# EAGLE board 808_kick (EAGLE 7.5.0)
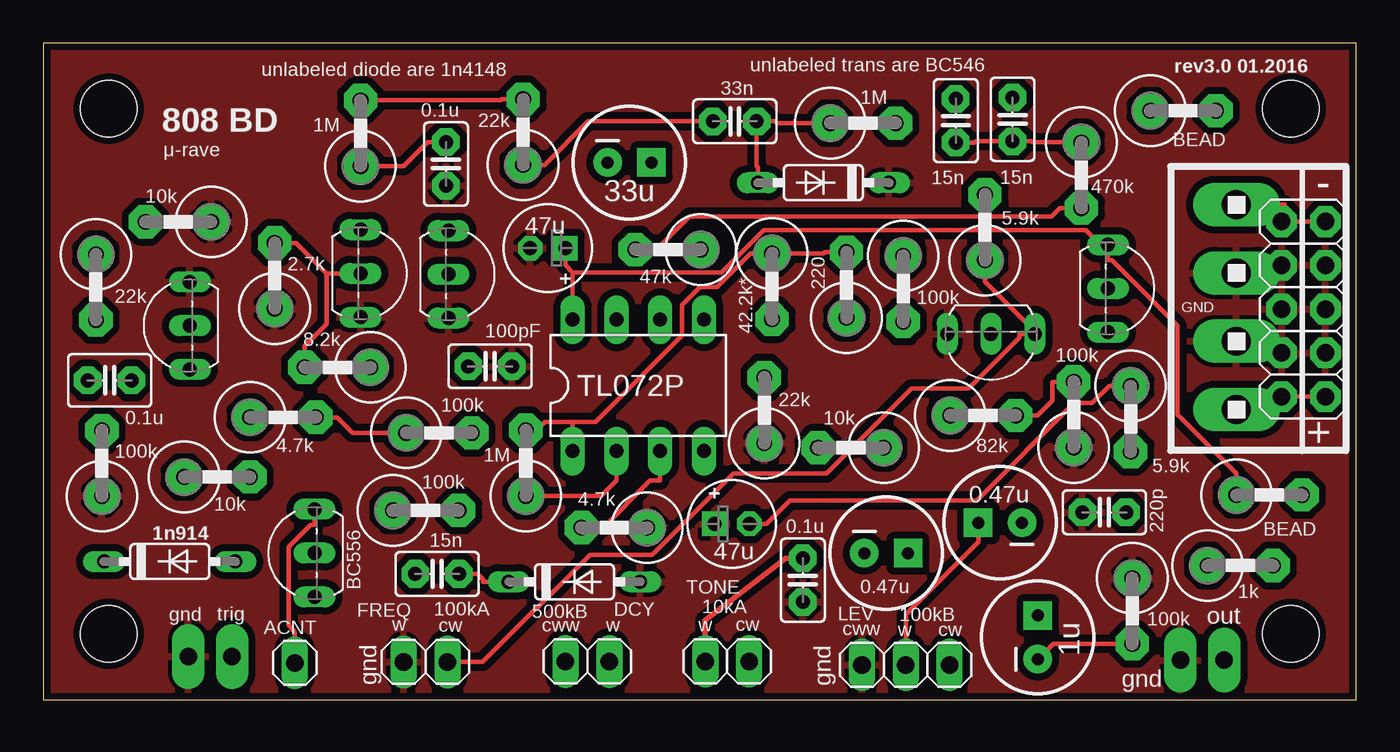
[diagram p0: board, top side]
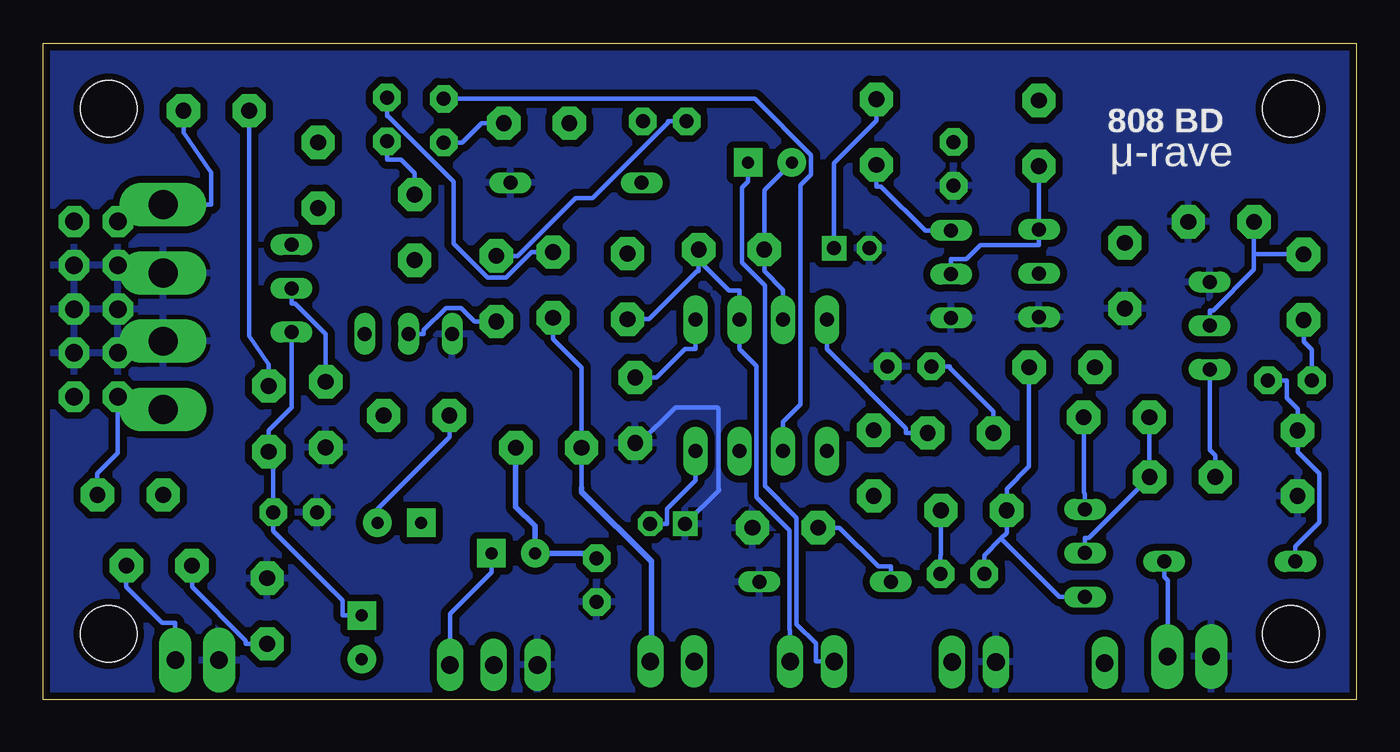
[diagram p1: board, bottom side, seen from below]

Size 76.2 x 38.1 mm. Coordinates in mm from the lower left corner, seen from the top.
Outline: 0,0 76.2,0 76.2,38.1 0,38.1 0,0
Copper layers (1*16): Top 0.0356mm / dielectric 1.5011mm / Bottom 0.0356mm
Design rules "LaenPCBOrder": minimum track width 6mil, minimum drill 13mil, track to track 6mil, track to pad 6mil, pad to pad 6mil, via to via 6mil, smd to smd 6mil, copper to edge 15mil, drill to drill 6mil, minimum pad ring 7mil, minimum via ring 7mil, stop-mask expansion 3mil, vias tented up to drill 0mil, thermal gap 10mil
Net classes: 0 default: width 0.254 mm
Holes 3.25 mm at 72.39,3.81 72.39,34.29 3.81,3.81 3.81,34.29

## Footprints (pad centres in the part's own frame; a part is rotated, then mirrored left to right if it is on the bottom)
1X01 = drill 1.016 long: 1 0,0
C2.5-3 = drill 0.813 pad 1.6 octagon: 1 -1.27,0; 2 1.27,0
CPOL-RADIAL-100UF-25V = drill 0.7 pad 1.651 square: 1 1.27,0 | drill 0.7 pad 1.651: 2 -1.27,0
E2-5 = drill 0.813 pad 1.422 square: + -1.016,0 | drill 0.813 pad 1.422 octagon: - 1.016,0
C2.5-2 = drill 0.813 pad 1.6 octagon: 1 -1.27,0; 2 1.27,0
DO35-7 = drill 0.813 long: A 3.81,0; C -3.81,0
1X02 = drill 1.016 long: 1 -1.27,0; 2 1.27,0
2X05 = drill 1.016 pad 1.778 octagon: 1 -5.08,-1.27; 2 -5.08,1.27; 3 -2.54,-1.27; 4 -2.54,1.27; 5 0,-1.27; 6 0,1.27; 7 2.54,-1.27; 8 2.54,1.27; 9 5.08,-1.27; 10 5.08,1.27
DIL08 = drill 0.813 pad 1.422 long: 1 -3.81,-3.81; 2 -1.27,-3.81; 3 1.27,-3.81; 4 3.81,-3.81; 5 3.81,3.81; 6 1.27,3.81; 7 -1.27,3.81; 8 -3.81,3.81
1X03 = drill 1.016 long: 1 -2.54,0; 2 0,0; 3 2.54,0
1X4MTA = drill 1.676 long: 1 5.944,0; 2 1.981,0; 3 -1.981,0; 4 -5.944,0
1X02_LONGPADS = drill 1.016 pad 1.88 long: 1 0,0; 2 2.54,0
0411V = drill 0.914 pad 1.93 octagon: 1 -2.54,0; 2 1.27,0
TO92-EBC = drill 0.813 long: B 0,-1.27; C -2.54,-1.27; E 2.54,-1.27

## Placement (x,y rotation side)
ACNT  [1X01]  14.61,2.13 90 top
C1  0.1u  [C2.5-3]  3.86,18.52 180 top
C2  0.47u  [CPOL-RADIAL-100UF-25V]  48.92,8.49 0 top
C3  1u  [CPOL-RADIAL-100UF-25V]  57.71,3.61 90 top
C4  47u  [E2-5]  39.96,10.19 0 top
C5  0.47u  [CPOL-RADIAL-100UF-25V]  55.53,10.26 180 top
C6  33u  [CPOL-RADIAL-100UF-25V]  34.02,31.16 0 top
C7  47u  [E2-5]  29.28,26.2 180 top
C8  0.1u  [C2.5-2]  23.37,31.08 270 top
C9  15n  [C2.5-2]  52.96,33.6 270 top
C10  0.1u  [C2.5-2]  44.08,6.93 270 top
C11  15n  [C2.5-2]  56.25,33.67 90 top
C12  33n  [C2.5-2]  40.13,33.56 0 top
C13  220p  [C2.5-2]  61.58,10.87 180 top
C14  15n  [C2.5-2]  22.86,7.29 0 top
C15  100pF  [C2.5-2]  25.94,19.34 0 top
D1  1N4148DO35-7  [DO35-7]  45.28,30 180 top
D2  1N4148DO35-7  [DO35-7]  30.83,6.84 0 top
D3  IN914  [DO35-7]  7.35,8.01 0 top
DCY  500kB  [1X02]  31.58,2.21 180 top
EURO_POWER  [2X05]  73.13,22.66 270 top
FREQ  100kA  [1X02]  22.19,2.18 0 top
IC2  TL072P  [DIL08]  34.53,18.23 0 top
LEV  100kB  [1X03]  50.05,2.01 0 top
MOTM_POWER  [1X4MTA]  69.24,22.78 270 top
OUT  [1X02_LONGPADS]  68.53,2.29 180 top
R1  22k  [0411V]  3.06,23.3 270 top
R2  10k  [0411V]  7.21,27.73 180 top
R3  100k  [0411V]  22.83,10.97 0 top
R4  4.7k  [0411V]  14.56,16.38 0 top
R5  8.2k  [0411V]  16.45,19.28 180 top
R6  2.7k  [0411V]  13.44,25.23 90 top
R7  1M  [0411V]  18.42,33.5 90 top
R8  220  [0411V]  46.61,24.7 90 top
R9  22k  [0411V]  27.85,33.57 90 top
R10  100k  [0411V]  63.2,4.5 270 top
R11  47k  [0411V]  35.62,26.12 180 top
R12  1k  [0411V]  70.1,7.78 0 top
R13  5.9k  [0411V]  63.11,15.66 270 top
R14  100k  [0411V]  59.8,17.17 90 top
R15  82k  [0411V]  55.17,16.49 0 top
R16  1M  [0411V]  28.01,14.36 90 top
R17  5.9k  [0411V]  54.65,28.04 90 top
R18  100k  [0411V]  23.61,15.48 0 top
R19  100k  [0411V]  49.91,23.21 270 top
R20  42.2k*  [0411V]  42.29,23.35 270 top
R21  10k  [0411V]  46.23,14.61 180 top
R22  1M  [0411V]  48.2,33.45 0 top
R23  4.7k  [0411V]  32.5,9.97 180 top
R24  470k  [0411V]  60.24,29.8 270 top
R25  22k  [0411V]  41.85,17.42 90 top
R26  100k  [0411V]  3.41,14.35 90 top
R27  10k  [0411V]  10.73,12.91 0 top
R28  BEAD  [0411V]  66.78,34.18 0 top
R29  BEAD  [0411V]  71.78,11.88 0 top
T1  BC546A  [TO92-EBC]  24.79,24.68 270 top
T2  BC546A  [TO92-EBC]  19.69,24.74 270 top
T3  BC546A  [TO92-EBC]  55,19.95 180 top
T4  BC556  [TO92-EBC]  14.47,8.5 90 top
T5  BC546A  [TO92-EBC]  7.25,21.7 90 top
T6  BC546A  [TO92-EBC]  63.06,23.86 270 top
TONE  10kA  [1X02]  39.69,2.22 180 top
TRIG  [1X02_LONGPADS]  10.96,2.5 180 top

## Library data of the parts
ACNT DCY EURO_POWER FREQ LEV TONE = pinhead
C1 C8-C15 = capacitor-wima
C2 C3 C5 C6 OUT TRIG = SparkFun
C4 C7 = rcl
D1-D3 = diode
IC2 = linear
MOTM_POWER = con-amp
R1-R29 = resistor
T1-T3 T5 T6 = transistor-npn
T4 = transistor-pnp

## Nets
+15V: C7.+ IC2.8 R7.2 R9.2 R18.2 R29.1 T6.C
-15V: C4.- IC2.4 R13.1 R28.1
GND: C4.+ C7.- C8.2 C10.2 C13.2 C15.2 D1.C D2.A EURO_POWER.3 EURO_POWER.4 EURO_POWER.5 EURO_POWER.6 EURO_POWER.7 EURO_POWER.8 FREQ.1 LEV.1 MOTM_POWER.2 MOTM_POWER.3 OUT.2 R2.1 R6.1 R10.1 R14.1 R23.1 R25.1 R26.1 T1.E T2.E T3.E T5.E TRIG.2
N$1: D3.A TRIG.1
N$2: R1.1 R2.2 T5.B
N$3: R4.1 R27.2 T4.B
N$4: ACNT.1 C15.1 R4.2 R18.1 T4.E
N$5: C14.1 R3.1 R5.1 T4.C
N$6: C14.2 D2.C IC2.3 R3.2 R23.2
N$7: FREQ.2 R17.1 T3.C
N$8: C9.1 IC2.2 R16.1
N$9: C6.1 DCY.2
N$10: R5.2 R6.2 T2.B
N$11: C8.1 R7.1 T1.B T2.C
N$12: OUT.1 R12.2
N$13: C12.1 R9.1 R19.1 T1.C
N$14: C12.2 D1.A R22.1
N$15: C3.1 C13.1 R13.2 T6.E
N$16: C9.2 C11.1 R17.2 R22.2 R24.1
N$17: R14.2 R15.2 T6.B
N$18: C1.1 D3.C R26.2
N$19: C5.2 R15.1
N$20: C3.2 R10.2 R12.1
N$21: R19.2 T3.B
N$22: R27.1 T5.C
N$23: C11.2 IC2.1 R8.2 R16.2 R20.1
N$24: R8.1 R21.2 TONE.1
N$25: IC2.5 R25.2
N$26: C5.1 LEV.2
N$28: C6.2 IC2.7 R11.2 R24.2
N$29: C1.2 R1.2
N$30: DCY.1 IC2.6 R11.1 R20.2
N$31: C2.1 LEV.3
N$32: C2.2 C10.1 R21.1 TONE.2
NEG_INPUT: EURO_POWER.1 EURO_POWER.2 MOTM_POWER.4 R28.2
POS_INPUT: EURO_POWER.9 EURO_POWER.10 MOTM_POWER.1 R29.2

## Tracks (layer width: path | path; a pad name or v marks a point on that pad's centre or on a via)
+15V
  Top 0.254: 30.72,24.79 30.3,25.21 C7.+ | 30.72,24.79 30.72,23.64 IC2.8 | 61.79,25.96 60.49,27.26 41.82,27.26 39.35,24.79 30.72,24.79 | 61.79,25.96 61.79,25.52 62.01,25.52 65.82,21.71 65.82,16.54 69.24,13.12 R29.1 | T6.C 61.79,25.96 | R9.2 26.61,34.84 26.54,34.77 R7.2
  Bottom 0.254: R18.2 26.12,15.48 26.12,15.74 30.72,20.34 IC2.8 | C7.+ 30.3,31.14 27.85,33.59 R9.2
-15V
  Top 0.254: C4.- 41.97,10.19 43.34,11.56 54.18,11.56 59.82,17.2 60.87,17.2 61.86,18.2 R13.1
  Bottom 0.254: R13.1 63.11,19.44 64.24,21.1 R28.1 | C4.- 39.99,10.19 39.99,11.07 38.34,12.72 IC2.4
GND
  Bottom 0.254: R25.1 41.58,14.88 39.51,16.96 37.08,16.96 37.02,16.89 37.02,12.25 36.99,12.22 36.99,12.15 C4.+
  pour Bottom (isolate 0.406): 0.32,37.66 75.91,37.74 75.6,0.25 0.4,0.4
  pour Top (isolate 0.406): 0.42,37.64 75.88,37.74 75.74,0.31 0.31,0.31
N$1
  Bottom 0.254: D3.A 11.16,7.12 10.94,6.91 10.94,2.27 TRIG.1
N$2
  Bottom 0.254: 5.94,25.84 R2.2 | 5.94,25.84 5.94,24.94 8.29,22.59 8.52,22.59 T5.B | 5.94,25.84 4.31,25.84 R1.1
N$3
  Bottom 0.254: T4.B 15.74,9.39 15.52,9.39 12.62,12.29 12.62,12.91 | 12.62,12.91 12.02,13.52 R4.1 | R27.2 12.62,12.91
N$4
  Top 0.254: R4.2 17.07,16.38 17.97,15.48 R18.1 | T4.E 15.74,10.15 15.52,10.15 14.25,8.87 14.25,4.29 14.61,3.93 ACNT.1
  Bottom 0.254: T4.E 15.74,11.93 15.83,12.01 R4.2 | C15.1 23.59,19.34 23.59,19.24 21.07,16.72 R18.1
N$5
  Bottom 0.254: 20.62,9.34 20.29,9.67 R3.1 20.29,12.22 18.99,13.52 R5.1 | 20.62,9.34 21.59,8.37 C14.1 | 20.62,9.34 17.24,5.96 T4.C
N$6
  Top 0.254: IC2.3 35.8,12.72 35.22,12.72 32.48,9.97 R23.2 | D2.C 25.52,6.84 25.52,6.98 25.21,7.29 C14.2
  Bottom 0.254: C14.2 24.13,8.37 24.1,8.4 R3.2 | D2.C 27.02,7.72 27.74,7.72 29.99,9.97 R23.2
N$7
  Top 0.254: R17.1 54.65,24.25 57.1,21.8 57.1,21.22 | 57.1,21.22 56.65,21.22 56.65,21 53.7,18.04 50.38,18.04 45.45,13.12 40.05,13.12 35.34,8.41 31.73,8.41 25.51,2.18 FREQ.2 | T3.C 57.1,21.22
N$8
  Top 0.254: IC2.2 33.26,12.72 32.36,11.82 R16.1
  Bottom 0.254: IC2.2 33.26,16.12 32.27,17.11 32.27,29.84 31.63,30.48 31.63,31.61 34.89,34.87 C9.1
N$9
  Bottom 0.254: DCY.2 31.35,2.21 31.35,3.25 32.48,4.38 32.48,10.55 34.33,12.39 34.33,24.04 35.64,25.35 35.64,29.71 35.29,30.06 C6.1
N$10
  Top 0.254: R5.2 15.18,20.52 16.45,21.8 16.45,24.73 | 16.45,24.73 14.69,26.5 R6.2 | T2.B 16.45,24.73
N$11
  Top 0.254: C8.1 22.3,32.35 20.9,30.96 R7.1
  Bottom 0.254: T1.B 23.52,25.57 22.63,25.57 21.81,26.39 18.42,26.39 T2.C 18.42,28.16 18.42,28.17 R7.1
N$12
  Bottom 0.254: OUT.1 68.53,4.45 69.28,4.45 71.37,6.53 R12.2
N$13
  Top 0.254: R9.1 29.1,31.03 31.63,33.56 C12.1
  Bottom 0.254: R19.1 48.66,25.75 45.3,29.11 44.31,29.11 39.94,33.48 39.94,33.56 C12.1 | R9.1 27.85,29.78 27.57,29.78 25.02,27.22 T1.C
N$14
  Top 0.254: D1.A 41.47,30.89 41.4,30.96 C12.2 42.48,33.56 42.58,33.45 R22.1
N$15
  Bottom 0.254: C3.1 58.82,4.88 58.82,5.76 62.85,9.79 C13.1 62.85,14.75 63.11,15.01 | 63.11,15.01 63.11,15.63 61.79,16.95 T6.E | R13.2 63.11,15.01
N$16
  Top 0.254: R24.1 57.4,32.34 57.33,32.4 C11.1 54.12,32.4 54.04,32.33 C9.2
  Bottom 0.254: C11.1 56.25,31.32 55.42,31.32 54.65,30.55 R17.2 | C9.2 51.88,32.33 50.75,33.45 R22.2
N$17
  Top 0.254: R14.2 58.55,18.44 58.55,17.36 57.68,16.49 R15.2
  Bottom 0.254: T6.B 61.79,22.98 61.57,22.98 59.8,21.2 R14.2
N$18
  Bottom 0.254: D3.C 3.54,8.9 2.14,10.29 2.14,13.11 3.41,14.38 R26.2 3.41,16.86 4.05,17.5 4.05,18.52 C1.1
N$19
  Bottom 0.254: R15.1 52.63,15.24 56.8,11.07 C5.2
N$20
  Top 0.254: R10.2 58.61,3.23 C3.2
  Bottom 0.254: R10.2 64.44,3.23 64.44,3.42 67.56,6.53 R12.1
N$21
  Bottom 0.254: R19.2 51.15,21.94 51.94,22.73 52.83,22.73 54.11,21.45 54.11,21.22 T3.B
N$22
  Bottom 0.254: R27.1 8.19,14.16 8.52,14.49 T5.C
N$23
  Top 0.254: 30.72,16.12 29.12,16.12 28.63,15.63 R16.2 | 30.72,16.12 32.05,16.12 37.06,21.14 37.06,22.89 38.1,23.93 39.09,23.93 41.05,25.89 R20.1 45.29,25.89 45.37,25.97 R8.2 | IC2.1 30.72,16.12
  Bottom 0.254: C11.2 56.25,33.87 56.18,33.87 52.38,30.06 52.38,26.45 50.4,24.48 49.35,24.48 47.86,25.97 R8.2
N$24
  Bottom 0.254: 44.96,12.29 R21.2 44.96,19.26 46.61,20.91 R8.1
  Bottom 0.305: 44.96,12.29 44.96,12.06 40.91,8.01 40.91,2.27 TONE.1
N$25
  Bottom 0.254: IC2.5 38.34,20.34 38.96,20.34 40.6,18.69 R25.2
N$26
  Top 0.254: C5.1 54.26,9.16 50.05,4.95 LEV.2
N$28
  Top 0.254: R11.2 35.6,26.12 37.52,28.03 58.51,28.03 59,28.53 R24.2
  Bottom 0.254: IC2.7 33.26,23.78 34.35,24.87 R11.2 34.35,29.56 C6.2
N$29
  Bottom 0.254: R1.2 3.06,20.79 2.59,20.32 C1.2
N$30
  Bottom 0.254: 38.16,25.49 36.41,23.74 35.8,23.74 IC2.6 35.8,20.34 34.81,19.35 34.81,11.73 32.88,9.81 32.88,4.05 32.85,4.01 DCY.1 | 38.16,25.49 38.16,24.87 38.25,24.87 41.05,22.07 R20.2 | R11.1 38.16,25.49
N$31
  Bottom 0.254: C2.1 50.19,7.38 52.59,4.98 LEV.3
N$32
  Top 0.305: C10.1 43.06,8.18 38.4,4.61 38.4,2.25 TONE.2
  Bottom 0.305: R21.1 48.77,11.19 47.67,10.08 47.67,8.51 C2.2 44.93,8.49 C10.1
NEG_INPUT
  Top 0.254: 72.03,27.92 EURO_POWER.1 | 72.03,27.92 72.03,28.72 MOTM_POWER.4 | EURO_POWER.2 72.21,27.74 72.03,27.92
  Bottom 0.254: R28.2 68.05,32.89 66.44,30.58 66.44,28.72 MOTM_POWER.4
POS_INPUT
  Top 0.254: EURO_POWER.10 EURO_POWER.9
  Bottom 0.254: MOTM_POWER.1 71.86,16.83 | 71.86,16.83 71.86,14.31 73.05,13.12 R29.2 | EURO_POWER.9 71.86,16.83

## Text on the board
tNames: unlabeled diode are 1n4148 | unlabeled trans are BC546 | rev3.0 01.2016 | 808 BD | μ-rave | - | GND | + | 1n914 | gnd | trig | w | cw | cww | w | w | cw | cww | w | cw | out | gnd | gnd | gnd
bNames: 808 BD | μ-rave